# Altium PCB Final board.PcbDoc (part 2 of 2)
Units mm, origin at the board's own origin, x right, y up, seen from the top; angles counter-clockwise.
Board outline 83.25 x 83.25 mm, 2 copper layers (Top Layer, Bottom Layer); 165 components, 137 nets, 668 pads, 0 vias.
Unrouted connection lines stored in the file: 495.
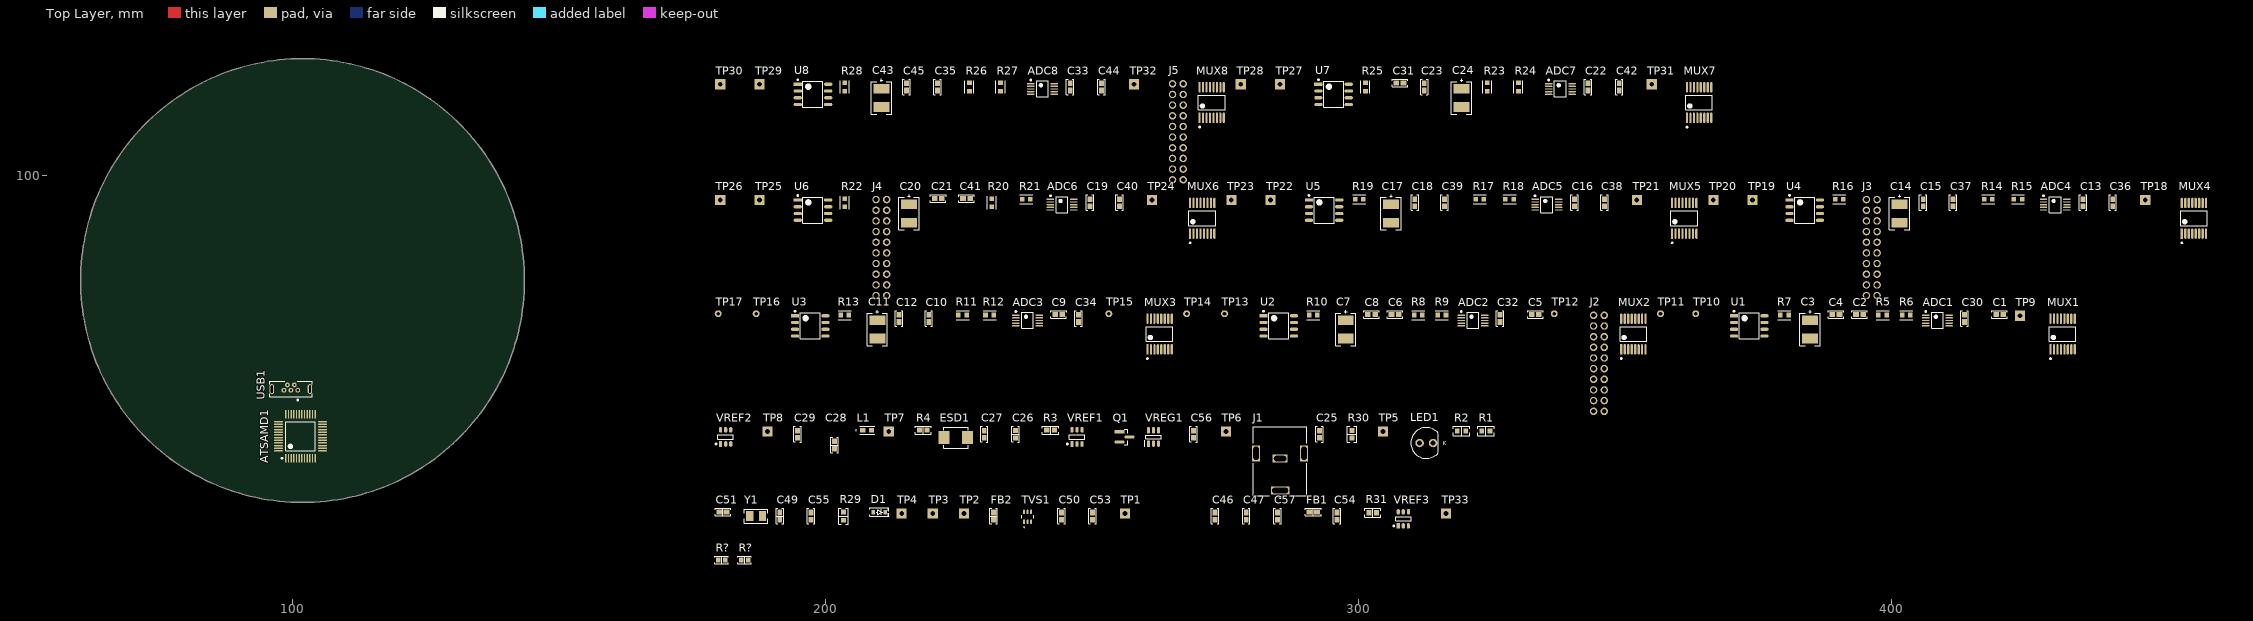
[diagram p0: Top Layer view]

## Part data (continued)
R?: library part RC0603FR-0788K7L, "RES 88.7K OHM 1% 1/10W 0603", Device Package="0603 (1608 Metric)", Manufacturer=Yageo, Operating Temperature="-55°C ~ 155°C", Power (Watts)="0.1W, 1/10W", Supplier Device Package=0603, Supplier Part Number 1=311-88.7KHRCT-ND, Temperature Coefficient=±100ppm/°C, Tolerance=±1%, ComponentLink1Description=Datasheet, ComponentLink1URL=https://www.yageo.com/upload/media/product/productsearch/datasheet/rchip/PYu-RC_Group_51_RoHS_L_10.pdf, ComponentLink2Description="DigiKey Link", ComponentLink2URL=https://www.digikey.com/en/products/detail/yageo/RC0603FR-0788K7L/727415, Composition="Thick Film", Features="Moisture Resistant", Height - Seated (Max)="0.022\" (0.55mm)", lastupdated="2023-03-08 20:30:08", Lifecycle Status=Active, Minimum Order=1, Number of Terminations=2, Package / Case="0603 (1608 Metric)", Packaging=CutTape, Part Number=RC0603FR-0788K7L, Part Status=Active, partid=7595, price=0.01, Resistance="88.7 kOhms", Series=RC_L, Size / Dimension="0.063\" L x 0.031\" W (1.60mm x 0.80mm)", Supplier 1=DigiKey
TP10 TP11 TP12 TP13 TP14 TP15 TP16 TP17: library part "Test Point", "Test Point"
TVS1: "25V Clamp 6A (8/20µs) Ipp Tvs Diode Surface Mount SC-70-6", Supplier Part Number 1=RCLAMP0504FATCTCT-ND, Supplier 1=Digi-Key, Supplier 2=Digi-Key, Supplier 3=Digi-Key, Supplier Part Number 2=RCLAMP0504FATCTDKR-ND, Supplier Part Number 3=RCLAMP0504FATCTTR-ND
U1 U2 U3: library part "Instrumentation Op Amp 35 MHz 8 pins", "Instrumentation Amplifier 1 Circuit Rail-to-Rail 8-SOIC", Supplier Part Number 1=MCP6N11-100E/SN-ND, Supplier 1=Digi-Key
U4 U5 U6 U7 U8: "Instrumentation Amplifier 1 Circuit Rail-to-Rail 8-SOIC", Supplier Part Number 1=MCP6N11-100E/SN-ND, Supplier 1=Digi-Key
USB1: library part "USB Micro-AB Connector A", "USB - Micro AB 2.0 Receptacle Connector 5 Position, Vertical, Through Hole with 2.30 mm (Standard) Shell Stakes, 5-Pin THD, RoHS, Tape and Reel", Supplier Part Number 1=18X0232, Supplier 1=Newark
VREF1 VREF3: "Series Voltage Reference IC Fixed 3.3V V ±0.1% 20 mA SOT-23-6", Case/Package=SOT-23-6, Max Operating Temperature=125°C, Min Operating Temperature=-40°C, Min Output Voltage=3.3V, Operating Supply Current=550μA, Output Current=20mA, Supplier Part Number 1=MCP1501T-33E/CHYCT-ND, Temperature Coefficient=50ppm/°C, Tolerance=0.08%, ComponentLink1Description=Datasheet, ComponentLink1URL=https://ww1.microchip.com/downloads/aemDocuments/documents/MSLD/ProductDocuments/DataSheets/MCP1501-Data-Sheet-DS20005474F.pdf, Output Type=Fixed, Reference Type=Series, Supplier 1=Digi-Key, Supplier 2=Digi-Key, Supplier 3=Digi-Key, Supplier Part Number 2=MCP1501T-33E/CHYDKR-ND, Supplier Part Number 3=MCP1501T-33E/CHYTR-ND
VREF2: "Series Voltage Reference IC Fixed 1.8V V ±0.1% 20 mA SOT-23-6", Case/Package=SOT-23-6, Max Operating Temperature=125°C, Min Operating Temperature=-40°C, Min Output Voltage=1.8V, Operating Supply Current=550μA, Output Current=20mA, Supplier Part Number 1=MCP1501T-18E/CHYCT-ND, Temperature Coefficient=50ppm/°C, Tolerance=0.08%, ComponentLink1Description=Datasheet, ComponentLink1URL=https://ww1.microchip.com/downloads/aemDocuments/documents/MSLD/ProductDocuments/DataSheets/MCP1501-Data-Sheet-DS20005474F.pdf, Output Type=Fixed, Reference Type=Series, Supplier 1=Digi-Key, Supplier 2=Digi-Key, Supplier Part Number 2=MCP1501T-18E/CHYDKR-ND
VREG1: "Buck Switching Regulator IC Positive Adjustable 1V 1 Output 1A SOT-23-6", Arrow Part Number=LMR50410YFQDBVRQ1, Manufacturer_Name="Texas Instruments", Mouser Part Number=595-MR50410YFQDBVRQ1, Supplier Part Number 1=296-LMR50410YFQDBVRQ1CT-ND, Arrow Price/Stock=https://www.arrow.com/en/products/lmr50410yfqdbvrq1/texas-instruments?region=nac, Datasheet Link=https://www.ti.com/product/LMR50410-Q1, Height=1.45mm, Manufacturer_Part_Number=LMR50410YFQDBVRQ1, Mouser Price/Stock=https://www.mouser.co.uk/ProductDetail/Texas-Instruments/LMR50410YFQDBVRQ1?qs=81r%252BiQLm7BRUAgUFqYZycA%3D%3D, Supplier 1=Digi-Key, Supplier 2=Digi-Key, Supplier 3=Digi-Key, Supplier Part Number 2=296-LMR50410YFQDBVRQ1DKR-ND, Supplier Part Number 3=296-LMR50410YFQDBVRQ1TR-ND
Y1: library part "Crystal Abracon ABS07", "32.768 kHz ±20ppm Crystal 6pF 55 kOhms 2-SMD, No Lead", ESR (Equivalent Series Resistance)="55 kOhms", Frequency="32.768 kHz", Frequency Tolerance=±20ppm, Load Capacitance=6pF, Manufacturer="Abracon LLC", Operating Mode=Fundamental, Operating Temperature="-40°C ~ 85°C", Package / Case="2-SMD, No Lead", Supplier Part Number 1=535-11937-1-ND, ComponentLink1Description=Datasheet, ComponentLink1URL=https://abracon.com/Resonators/ABS07-120-32.768kHz-T.pdf, ComponentLink2Description="DigiKey Link", ComponentLink2URL=https://www.digikey.com/en/products/detail/abracon-llc/ABS07-120-32-768KHZ-T/3724043, Height - Seated (Max)="0.035\" (0.90mm)", lastupdated="2023-03-06 20:57:22", Lifecycle Status=Active, Minimum Order=1, Mounting Type="Surface Mount", Packaging=TapeAndReel, Part Number=ABS07-120-32.768KHZ-T, Part Status=Active, partid=385, price=0.44, Series=ABS07, Size / Dimension="0.126\" L x 0.059\" W (3.20mm x 1.50mm)", Supplier 1=Digi-Key, Supplier 2=Digi-Key, Supplier 3=Digi-Key, Supplier Part Number 2=535-11937-6-ND, Supplier Part Number 3=535-11937-2-ND, Type="kHz Crystal (Tuning Fork)"

## Nets (pads, with @x,y where several pads share a name; then routed paths per layer and width w, separated by ;. In a path a pad name is that pad's centre, name@x,y a point inside that pad or via, vN(x,y) a via of type N, cw(c..) or ccw(c..) an arc to the next point about the centre after c; other vN are vias at no path point)
+1.8: ADC1.2 ADC2.2 ADC3.2 ADC4.2 ADC5.2 ADC6.2 ADC7.2 ADC8.2 C4.1 C8.1 C12.1 C15.1 C18.1 C21.1 C31.1 C45.1 TP7.1 VREF2.1
+3.3: ADC1.1 ADC2.1 ADC3.1 ADC4.1 ADC5.1 ADC6.1 ADC7.1 ADC8.1 C3.2 C7.2 C11.2 C14.2 C17.2 C20.2 C24.2 C43.2 R5.1 R7.1 R8.1 R10.1 R11.1 R13.1 R14.1 R16.1 R17.1 R19.1 R20.1 R22.1 R23.1 R25.1 R26.1 R28.1 R30.2 TP5.1 VREF1.1
+5: ADC1.9 ADC1.10 ADC2.9 ADC2.10 ADC3.9 ADC3.10 ADC4.9 ADC4.10 ADC5.9 ADC5.10 ADC7.9 ADC7.10 ADC8.9 ADC8.10 C1.2 C2.1 C5.2 C6.1 C9.2 C10.1 C13.2 C16.2 C19.2 C22.2 C23.1 C25.2 C28.2 C29.2 C30.2 C32.2 C33.2 C34.2 C35.1 C36.2 C37.1 C38.2 C39.1 C40.2 C41.1 C42.2 C44.2 L1.2 MUX1.2 MUX1.13 MUX2.2 MUX2.13 MUX3.2 MUX3.13 MUX4.2 MUX4.13 MUX5.2 MUX5.13 MUX6.2 MUX6.13 MUX7.2 MUX7.13 MUX8.2 MUX8.13 R4.2 TP8.1 U1.7 U1.8 U2.7 U2.8 U3.7 U3.8 U4.7 U4.8 U5.7 U5.8 U6.7 U6.8 U7.7 U7.8 U8.7 U8.8 VREF1.4 VREF2.4
A0: ATSAMD1.3
A1: ATSAMD1.47
A2: ATSAMD1.48
B1: J2.11 MUX2.4
B2: J2.12 MUX2.5
B3: J2.13 MUX2.6
B4: J2.14 MUX2.7
B5: J2.15 MUX2.12
B6: J2.16 MUX2.11
B7: J2.17 MUX2.10
B8: J2.18 MUX2.9
D0: ATSAMD1.31 MUX1.1 MUX2.1 MUX3.1 MUX4.1 MUX5.1 MUX6.1 MUX7.1 MUX8.1
D1: ATSAMD1.32 MUX1.16 MUX2.16 MUX3.16 MUX4.16 MUX5.16 MUX6.16 MUX7.16 MUX8.16
D2: ATSAMD1.15 MUX1.15 MUX2.15 MUX3.15 MUX4.15 MUX5.15 MUX6.15 MUX7.15 MUX8.15
D3: ATSAMD1.16
D4: ADC1.6 ATSAMD1.19
D5: ADC2.6 ATSAMD1.20
D6: ADC3.6 ATSAMD1.29
D7: ADC4.6 ATSAMD1.30
D8: ADC5.6 ATSAMD1.25
D11: ADC6.6 ATSAMD1.13
D12: ADC7.6 ATSAMD1.14
D13: ADC8.6 ATSAMD1.38
D14/TX: ATSAMD1.37
D+: ATSAMD1.34 TP3.1 TVS1.1 USB1.3
D-: ATSAMD1.33 TP2.1 TVS1.6 USB1.2
E1: J3.11 MUX4.4
E2: J3.12 MUX4.5
E3: J3.13 MUX4.6
E4: J3.14 MUX4.7
E5: J3.15 MUX4.12
E6: J3.16 MUX4.11
E7: J3.17 MUX4.10
E8: J3.18 MUX4.9
F1: J4.2 MUX5.4
F2: J4.3 MUX5.5
F3: J4.4 MUX5.6
F4: J4.5 MUX5.7
F5: J4.6 MUX5.12
F6: J4.7 MUX5.11
F7: J4.8 MUX5.10
F8: J4.9 MUX5.9
G1: J4.11 MUX6.4
G2: J4.12 MUX6.5
G3: J4.13 MUX6.6
G4: J4.14 MUX6.7
G5: J4.15 MUX6.12
G6: J4.16 MUX6.11
G7: J4.17 MUX6.10
G8: J4.18 MUX6.9
GND: ADC1.4 ADC1.5 ADC2.4 ADC2.5 ADC3.4 ADC3.5 ADC4.4 ADC4.5 ADC5.4 ADC5.5 ADC6.4 ADC6.5 ADC7.4 ADC7.5 ADC8.4 ADC8.5 ATSAMD1.5 ATSAMD1.18 ATSAMD1.35 ATSAMD1.42 C1.1 C2.2 C3.1 C4.2 C5.1 C6.2 C7.1 C8.2 C9.1 C10.2 C11.1 C12.2 C13.1 C14.1 C15.2 C16.1 C17.1 C18.2 C19.1 C20.1 C21.2 C22.1 C23.2 C24.1 C26.1 C28.1 C30.1 C31.2 C32.1 C33.1 C34.1 C35.2 C36.1 C37.2 C38.1 C39.2 C40.1 C41.2 C42.1 C43.1 C44.1 C45.2 C46.1 C47.2 C49.1 C50.1 C51.1 C53.1 C55.1 C56.1 C57.1 ESD1.2 J2.1 J2.10 J2.19 J2.20 J3.1 J3.10 J3.19 J3.20 J4.1 J4.10 J4.19 J4.20 J5.1 J5.10 J5.19 J5.20 LED1.1 MUX1.14 MUX2.14 MUX3.14 MUX4.14 MUX5.14 MUX6.14 MUX7.14 MUX8.14 Q1.2 R2.1 R3.1 R6.2 R9.2 R12.2 R15.2 R18.2 R21.2 R24.2 R27.2 R29.2 U1.4 U1.5 U2.4 U2.5 U3.4 U3.5 U4.4 U4.5 U5.4 U5.5 U6.4 U6.5 U7.4 U7.5 U8.4 U8.5 VREF1.2 VREF1.3 VREF1.5 VREF2.2 VREF2.3 VREF2.5 VREF3.2 VREF3.3 VREF3.5 VREG1.2
H1: J5.2 MUX7.4
H2: J5.3 MUX7.5
H3: J5.4 MUX7.6
H4: J5.5 MUX7.7
H5: J5.6 MUX7.12
H6: J5.7 MUX7.11
H7: J5.8 MUX7.10
H8: J5.9 MUX7.9
I1: J5.11 MUX8.4
I2: J5.12 MUX8.5
I3: J5.13 MUX8.6
I4: J5.14 MUX8.7
I5: J5.15 MUX8.12
I6: J5.16 MUX8.11
I7: J5.17 MUX8.10
I8: J5.18 MUX8.9
MISO: ADC1.7 ADC2.7 ADC3.7 ADC4.7 ADC5.7 ADC6.7 ADC7.7 ADC8.7 ATSAMD1.28 TP10.1 TP13.1 TP16.1 TP19.1 TP22.1 TP25.1 TP27.1 TP29.1
NetADC1_3: ADC1.3 TP11.1 U1.1 U1.6
NetADC2_3: ADC2.3 TP14.1 U2.1 U2.6
NetADC3_3: ADC3.3 TP17.1 U3.1 U3.6
NetADC4_3: ADC4.3 TP20.1 U4.1 U4.6
NetADC5_3: ADC5.3 TP23.1 U5.1 U5.6
NetADC6_3: ADC6.3 TP26.1 U6.1 U6.6
NetADC7_3: ADC7.3 TP28.1 U7.1 U7.6
NetADC8_3: ADC8.3 TP30.1 U8.1 U8.6
NetC25_1: C25.1 VREF1.6
NetC26_2: C26.2 TP6.1 VREG1.4 VREG1.5
NetC27_1: C27.1 L1.1 VREG1.6
NetC27_2: C27.2 VREG1.1
NetC29_1: C29.1 VREF2.6
NetC53_2: C53.2 FB2.1 TP1.1 TVS1.5 USB1.1
NetC54_2: C54.2 VREF3.4
NetC55_2: C55.2 R29.1
NetC56_2: C56.2 R30.1
NetC57_2: C57.2 R31.1
NetD1_1: D1.1 TP4.1 TVS1.3 USB1.4
NetESD1_1: ESD1.1 Q1.1
NetJ3_2: J3.2 MUX3.4
NetJ3_3: J3.3 MUX3.5
NetJ3_4: J3.4 MUX3.6
NetJ3_5: J3.5 MUX3.7
NetJ3_6: J3.6 MUX3.12
NetJ3_7: J3.7 MUX3.11
NetJ3_8: J3.8 MUX3.10
NetJ3_9: J3.9 MUX3.9
NetLED1_2: LED1.2 R1.1 R2.2
NetMUX1_8: MUX1.8 R7.2 TP9.1 U1.3
NetMUX2_8: MUX2.8 R10.2 TP12.1 U2.3
NetMUX3_8: MUX3.8 R13.2 TP15.1 U3.3
NetMUX4_8: MUX4.8 R16.2 TP18.1 U4.3
NetMUX5_8: MUX5.8 R19.2 TP21.1 U5.3
NetMUX6_8: MUX6.8 R22.2 TP24.1 U6.3
NetMUX7_8: MUX7.8 R25.2 TP31.1 U7.3
NetMUX8_8: MUX8.8 R28.2 TP32.1 U8.3
NetQ1_3: Q1.3
NetR1_2: R1.2
NetR3_2: R3.2 R4.1 VREG1.3
NetR5_2: R5.2 R6.1 U1.2
NetR8_2: R8.2 R9.1 U2.2
NetR11_2: R11.2 R12.1 U3.2
NetR14_2: R14.2 R15.1 U4.2
NetR17_2: R17.2 R18.1 U5.2
NetR20_2: R20.2 R21.1 U6.2
NetR23_2: R23.2 R24.1 U7.2
NetR26_2: R26.2 R27.1 U8.2
NetR31_2: R31.2 TP33.1 VREF3.1
NetTVS1_2: TVS1.2 USB1.5
NetTVS1_4: TVS1.4 USB1.6 USB1.7
SCLK: ADC1.8 ADC2.8 ADC3.8 ADC4.8 ADC5.8 ADC6.8 ADC7.8 ADC8.8 ATSAMD1.26
USBID: ATSAMD1.27
VBUS: C50.2 C54.1 FB2.2 VREF3.6
VDDCORE: ATSAMD1.43
VDDIN: ATSAMD1.6 ATSAMD1.17 ATSAMD1.36 ATSAMD1.40 ATSAMD1.44 C46.2 C47.1 FB1.1
X1: J2.2 MUX1.4
X2: J2.3 MUX1.5
X3: J2.4 MUX1.6
X4: J2.5 MUX1.7
X5: J2.6 MUX1.12
X6: J2.7 MUX1.11
X7: J2.8 MUX1.10
X8: J2.9 MUX1.9
XIN32: ATSAMD1.1 C49.2 Y1.2
XOUT32: ATSAMD1.2 C51.2 Y1.1
pads on no net: ADC6.9 ADC6.10 ATSAMD1.4 ATSAMD1.7 ATSAMD1.8 ATSAMD1.9 ATSAMD1.10 ATSAMD1.11 ATSAMD1.12 ATSAMD1.21 ATSAMD1.22 ATSAMD1.23 ATSAMD1.24 ATSAMD1.39 ATSAMD1.41 ATSAMD1.45 ATSAMD1.46 D1.2 FB1.2 J1.1 J1.2 J1.3 J1.4 J1.5 MUX1.3 MUX2.3 MUX3.3 MUX4.3 MUX5.3 MUX6.3 MUX7.3 MUX8.3 R?.1 R?.2

## Text inside footprints (layer, text, board x,y; h text height)
LED1: Top Overlay "K" at 315.722,49.403 h0.76; Mechanical 15 "K" at 315.722,49.403 h0.76